# Altium PCB EverySyncBoard.PcbDoc.pcbdoc (part 1 of 2)
Units mil, origin at the board's own origin, x right, y up, seen from the top; angles counter-clockwise.
Board outline 3490 x 2630 mil, 2 copper layers (Top Layer, Bottom Layer); 156 components, 115 nets, 534 pads, 233 vias.
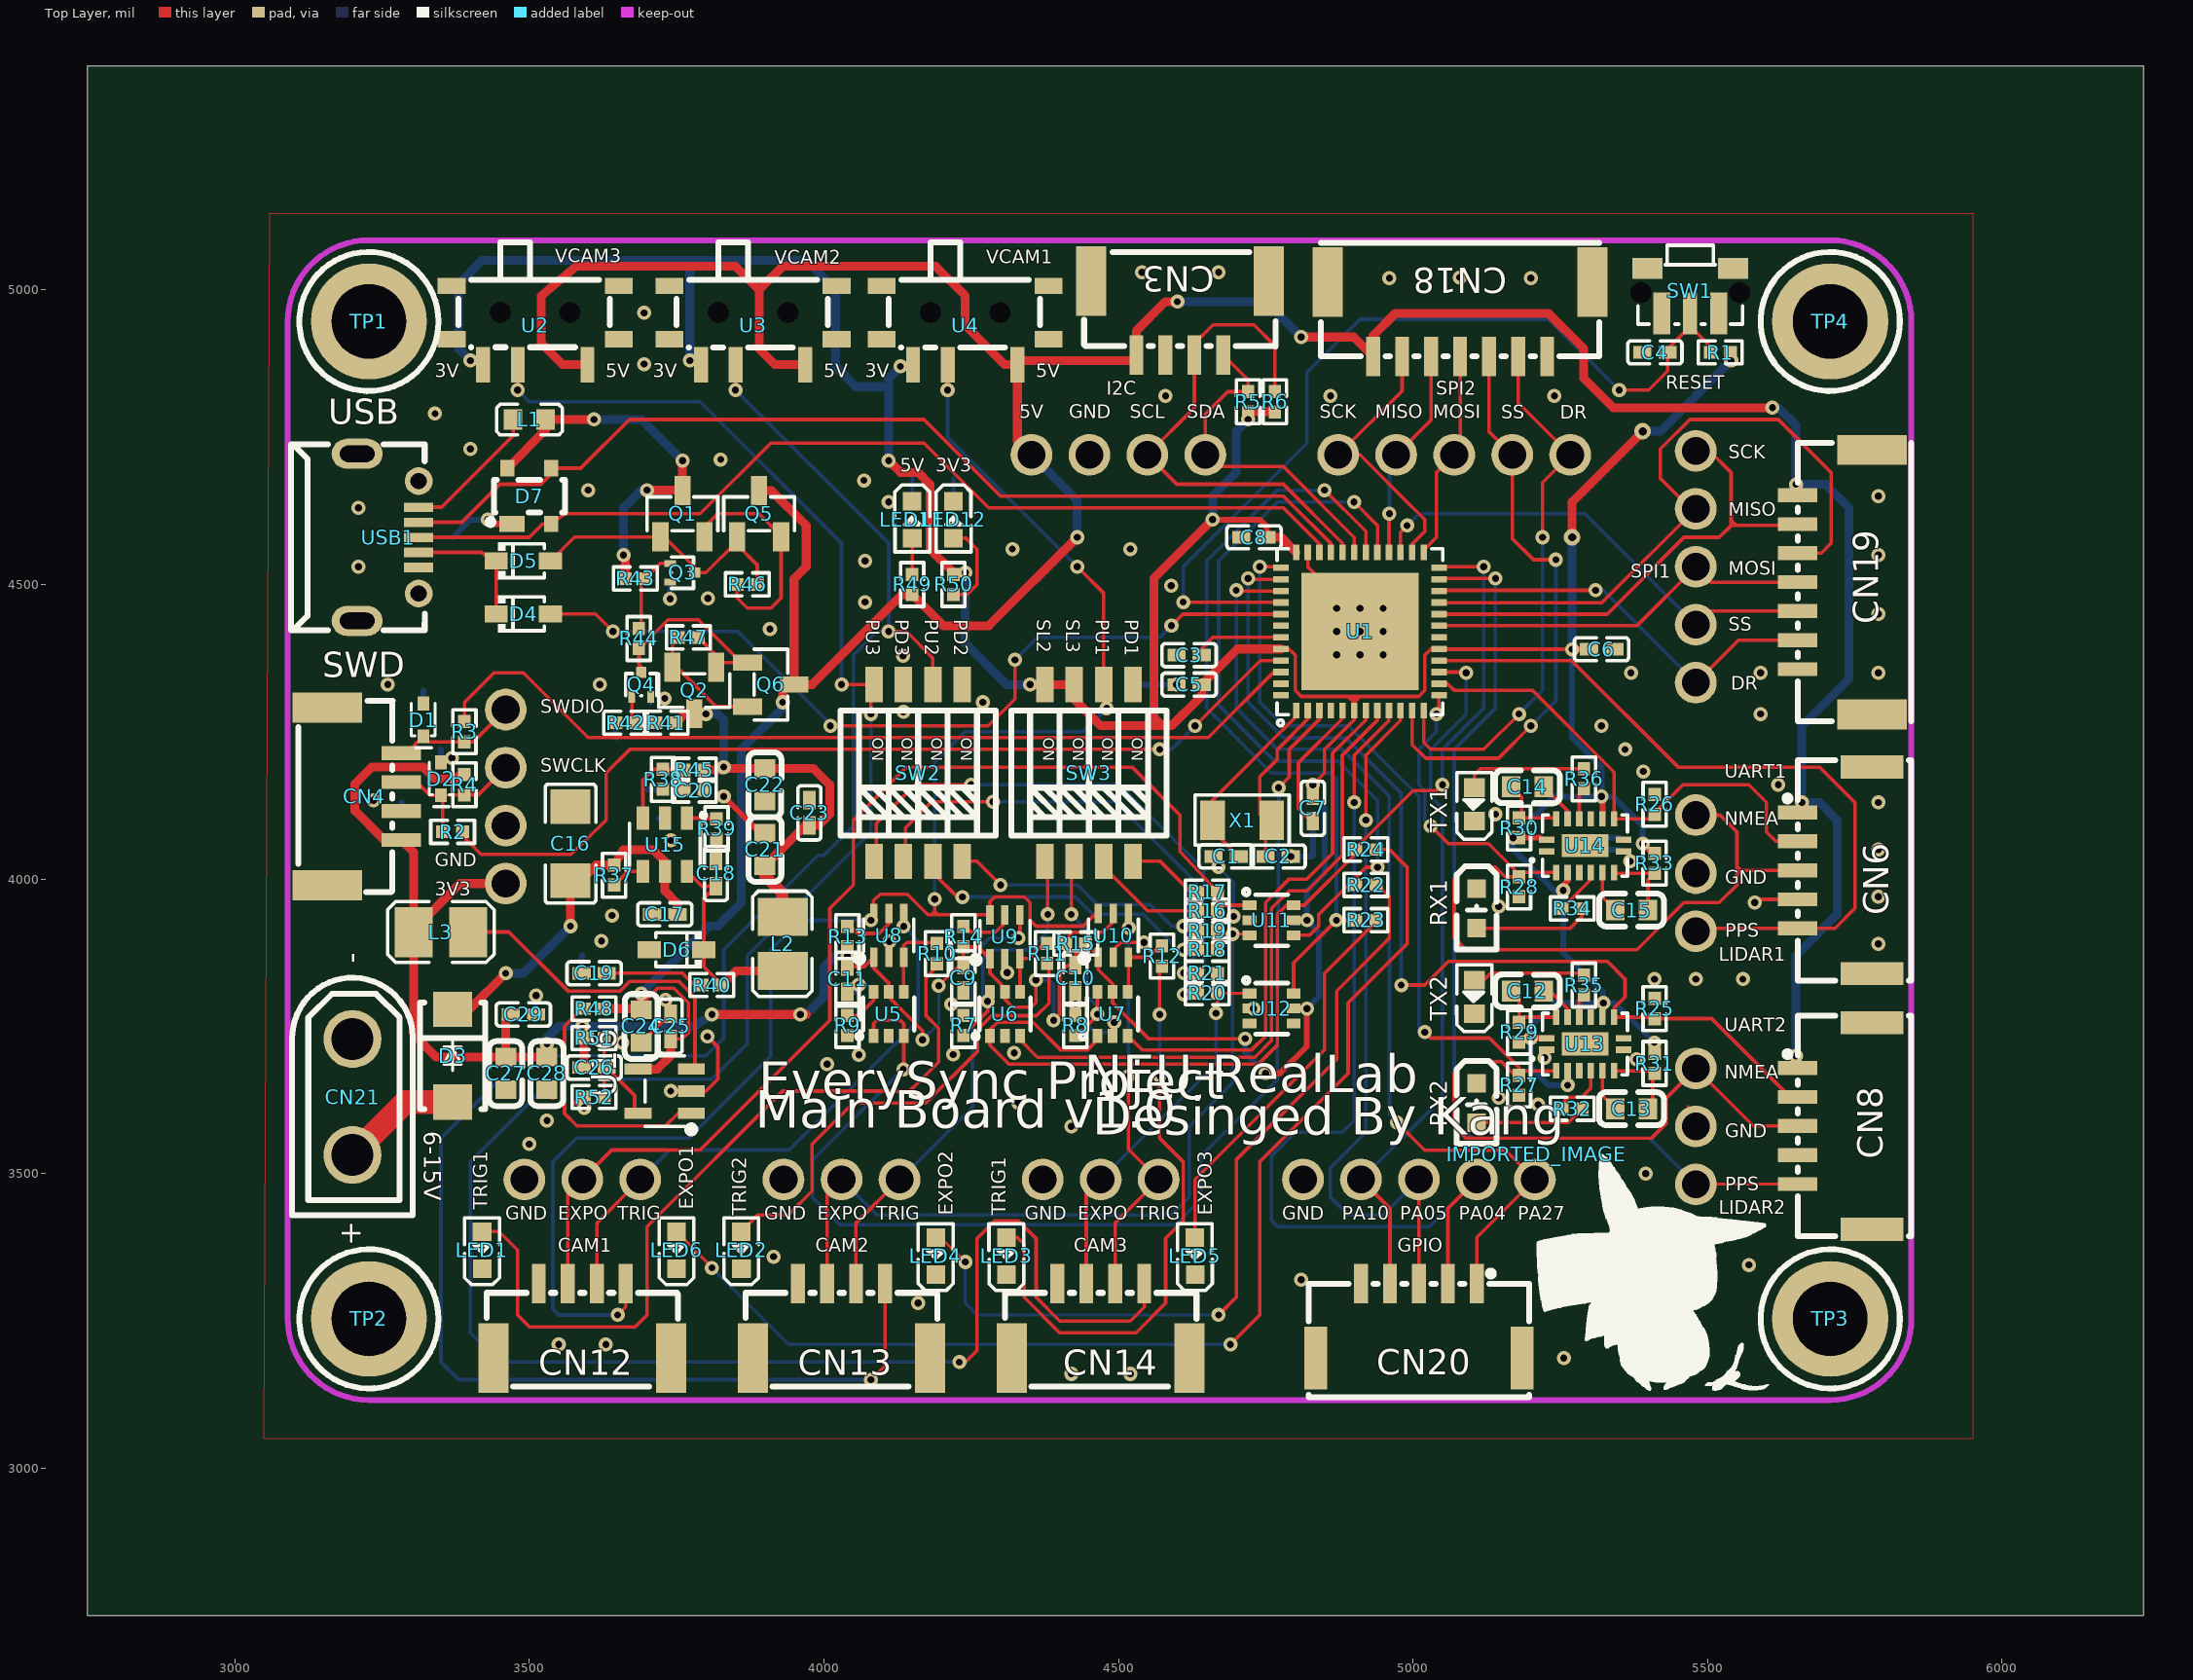
[diagram p0: Top Layer view]
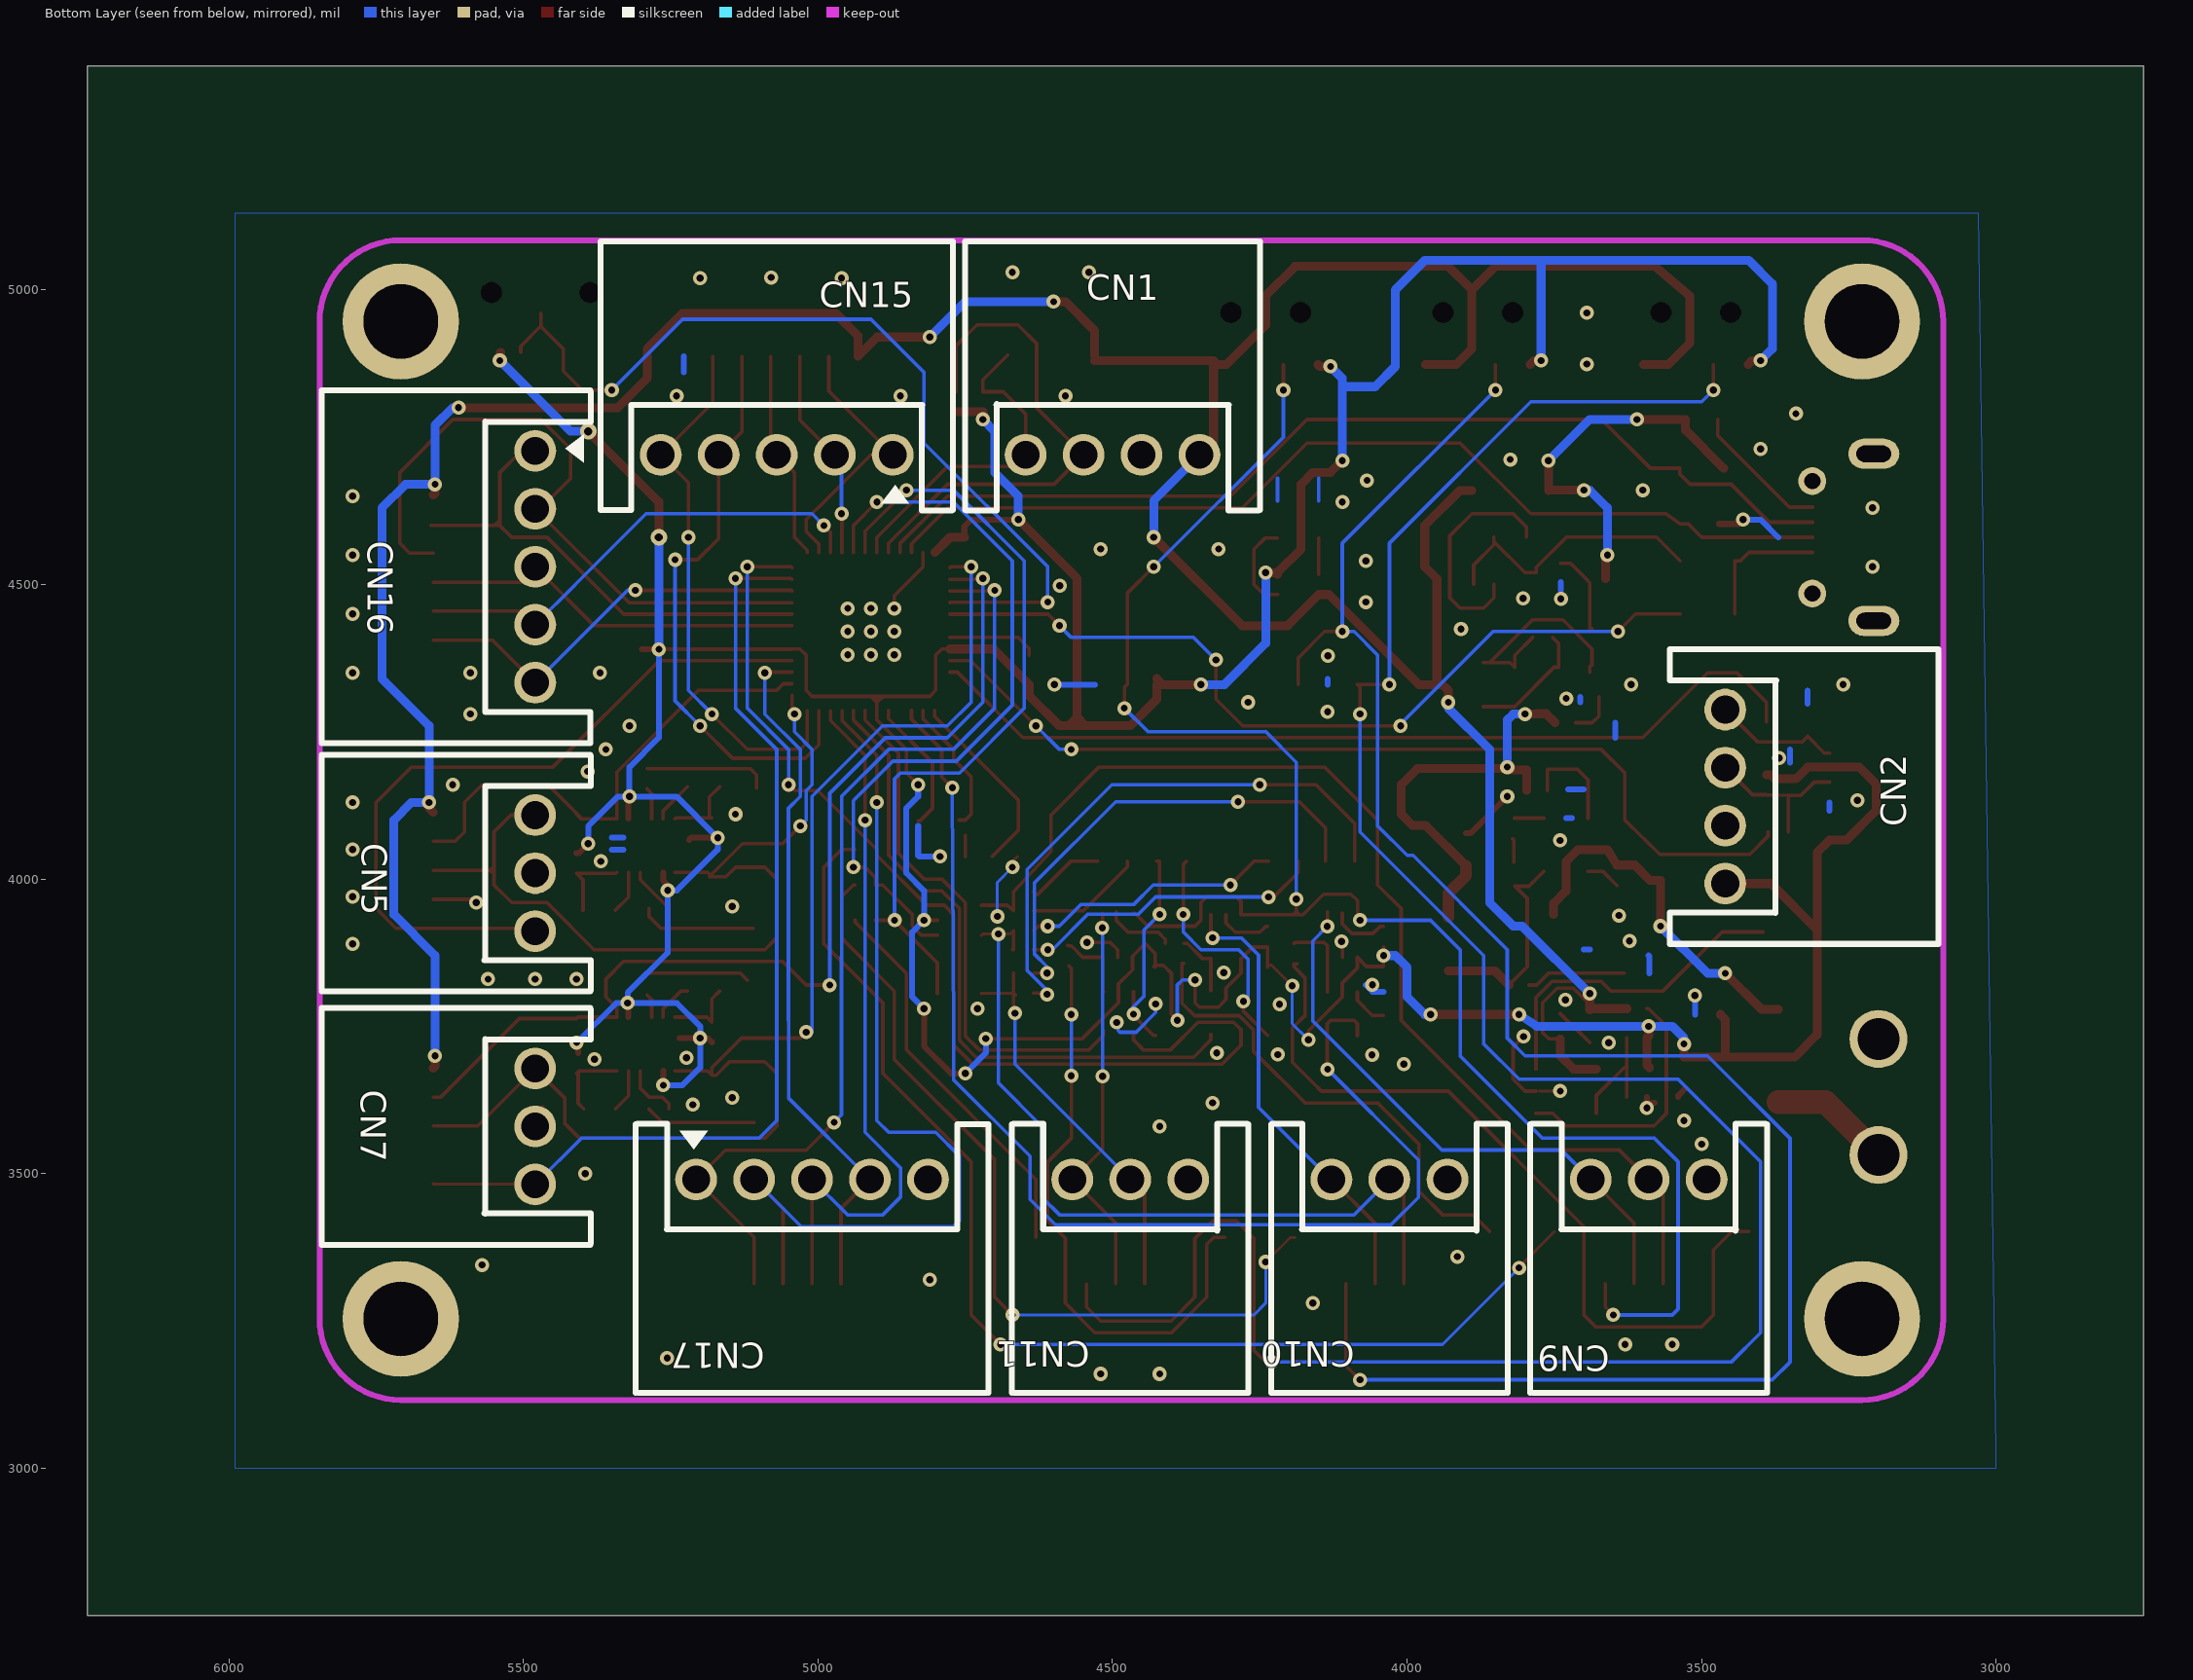
[diagram p1: Bottom Layer view, seen from below]

## Layer stack, top to bottom
Top Layer: signal copper (thickness not stored)
Dielectric: dielectric 12.6, FR-4, Dk 4.8
Bottom Layer: signal copper (thickness not stored)

## Board outline
6240,2750 2750,2750 2750,5380 6240,5380

## Components (designator, comment, footprint, x,y, rotation, side; value= is the part's Value field where it differs from the comment)
C1 "18pF/0402/50V" C0402 4682.87,4038.29 r180 top
C2 "18pF/0402/50V" C0402 4771.17,4038.19 r0 top
C3 "100nF/0603/50V" C0402 4620,4380 r180 top
C4 "100nF/0402/50V" C0402 5410.58,4893.88 r0 top
C5 "100nF/0603/50V" C0402 4620,4330 r180 top
C6 "100nF/0603/50V" C0402 5320,4390 r0 top
C7 "100nF/0603/50V" C0402 4830,4120 r270 top
C8 "100nF/0603/50V" C0402 4730,4580 r180 top
C9 "100nF/0603/50V" C0402 4236.85,3832.26 r270 top
C10 "100nF/0603/50V" C0402 4426.85,3832.26 r270 top
C11 "100nF/0603/50V" C0402 4040,3830 r270 top
C12 "2.2u" C0603 5194.12,3810 r180 top
C13 "2.2u" C0603 5371.12,3610 r0 top
C14 "2.2u" C0603 5194.12,4156.73 r180 top
C15 "2.2u" C0603 5371.12,3947.23 r0 top
C16 "10uF/1206/50V" C1206 3570,4060 r270 top
C17 "100nF/0603/50V" C0402 3730,3940 r0 top
C18 "100nF/0603/50V" C0402 3816.85,4009.26 r90 top
C19 "100nF/0603/50V" C0402 3610,3840 r0 top
C20 "100nF/0603/50V" R0402 3779.85,4150.26 r0 top
C21 "22uF/0603/10V" C0603 3900,4050 r270 top
C22 "22uF/0603/10V" C0603 3900,4160 r90 top
C23 "100nF/0603/50V" C0402 3975.45,4112.26 r270 top
C24 "22uF/0603/10V" C0603 3690,3750 r90 top
C25 "100nF/0603/50V" C0402 3740,3750 r270 top
C26 "22pF/0402/50V" C0402 3610,3680 r180 top
C27 "22uF/0603/10V" C0603 3460,3670 r90 top
C28 "22uF/0603/10V" C0603 3530,3670 r90 top
C29 "100nF/0603/50V" C0402 3490,3770 r180 top
CN1 "A2501WR-4P" CONN-TH_A2501WR-4P 4499.97,4719.95 r0 bottom
CN2 "A2501WR-4P" CONN-TH_A2501WR-4P 3459.97,4139.95 r90 bottom
CN3 "A1257WR-S-4P" CONN-SMD_A1257WR-S-4P 4604.27,4952.2 r180 top
CN4 "A1257WR-S-4P" CONN-SMD_A1257WR-S-4P 3220,4140 r270 top
CN5 "A2501WR-3P" CONN-TH_A2501WR-3P 5479.98,4010 r270 bottom
CN6 "A1257WR-S-5P" CONN-SMD_A1257WR-S-5P 5715.97,4014.72 r90 top
CN7 "A2501WR-3P" CONN-TH_A2501WR-3P 5479.98,3580 r270 bottom
CN8 "A1257WR-S-5P" CONN-SMD_A1257WR-S-5P 5715.97,3580.72 r90 top
CN9 "A2501WR-3P" CONN-TH_A2501WR-3P 3589.98,3490 r180 bottom
CN10 "A2501WR-3P" CONN-TH_A2501WR-3P 4029.98,3490 r180 bottom
CN11 "A2501WR-3P" CONN-TH_A2501WR-3P 4470,3490 r180 bottom
CN12 "A1257WR-S-4P" CONN-SMD_A1257WR-S-4P 3590,3250 r0 top
CN13 "A1257WR-S-4P" CONN-SMD_A1257WR-S-4P 4030,3250 r0 top
CN14 "A1257WR-S-4P" CONN-SMD_A1257WR-S-4P 4470,3250 r0 top
CN15 "A2501WR-5P" CONN-TH_A2501WR-5P 5069.96,4720 r0 bottom
CN16 "A2501WR-5P" CONN-TH_A2501WR-5P 5479.96,4530 r270 bottom
CN17 "A2501WR-5P" CONN-TH_A2501WR-5P 5010,3490 r180 bottom
CN18 "A1257WR-S-7P" CONN-SMD_A1257WR-S-7P 5079.97,4950 r180 top
CN19 "A1257WR-S-7P" CONN-SMD_A1257WR-S-7P 5715.97,4503.9 r90 top
CN20 "A1257WR-S-5P" CONN-SMD_A1257WR-S-5P 5010,3250 r0 top
CN21 "XT30UPB-M" CONN-TH_XT30UPB-M 3199.97,3629.99 r270 top
D1 "ESD5Z3.3T1G-MS" SOD-523 3320,4270 r90 top
D2 "ESD5Z3.3T1G-MS" SOD-523 3350,4170 r90 top
D3 "SS54B" DO-214BA_L4.8-W2.9-LS5.3-RD 3370,3700 r270 top
D4 "SD103AWS" SOD-323_L1.8-W1.3-LS2.5-RD 3490,4450 r0 top
D5 "SD103AWS" SOD-323_L1.8-W1.3-LS2.5-RD 3490,4540 r0 top
D6 "SD103AWS" SOD-323_L1.8-W1.3-LS2.5-RD 3750,3880 r180 top
D7 "PRTR5V0U2X" SOT-143_L2.9-W1.3-P1.92-LS2.3-BL 3500,4650 r0 top
IMPORTED_IMAGE "IMPORTED_IMAGE" IMPORTED_IMAGE 5209.91,3533.32 r0 top
L1 "BLM18SG121TN1D" L0603 3500,4780 r180 top
L2 "10uH" L1008 3930,3890 r90 top
L3 "PSPNAQ252012-2R2M" L2520 3350,3910 r180 top
LED1 "19-217/GHC-YR1S2/3T" LED0603-RD 3420,3370 r90 top
LED2 "19-217/GHC-YR1S2/3T" LED0603-RD 3860,3370 r90 top
LED3 "19-217/GHC-YR1S2/3T" LED0603-RD 4310,3360 r90 top
LED4 "19-213/Y2C-CQ2R2L/3T(CY)" LED0603-RD-YELLOW 4190,3360 r90 top
LED5 "19-213/Y2C-CQ2R2L/3T(CY)" LED0603-RD-YELLOW 4630,3360 r90 top
LED6 "19-213/Y2C-CQ2R2L/3T(CY)" LED0603-RD-YELLOW 3750,3370 r90 top
LED11 "KT-0603R" LED0603-RD 4150,4610 r270 top
LED12 "19-213/Y2C-CQ2R2L/3T(CY)" LED0603-RD-YELLOW 4220,4610 r270 top
Q1 "AO3401" SOT-23-3_L2.9-W1.3-P1.90-LS2.4-BR 3760,4620 r270 top
Q2 "AO3401" SOT-23-3_L2.9-W1.3-P1.90-LS2.4-BR 3780,4320 r90 top
Q3 "2SK3541" SOT-723_L1.2-W0.8-P0.40-LS1.2-BR 3760,4520 r180 top
Q4 "2SK3541" SOT-723_L1.2-W0.8-P0.40-LS1.2-BR 3690,4330 r270 top
Q5 "AO3401" SOT-23-3_L2.9-W1.3-P1.90-LS2.4-BR 3890,4620 r270 top
Q6 "AO3401" SOT-23-3_L2.9-W1.3-P1.90-LS2.4-BR 3910,4330 r180 top
R1 "10K/0402/1%" R0402 5521.58,4893.88 r0 top
R2 "22R/0402/1%" R0402 3370,4080 r180 top
R3 "22R/0402/1%" R0402 3390,4250 r270 top
R4 "10K/0402/1%" R0402 3390,4160 r90 top
R5 "2.2K/0402/1%" R0402 4720,4810 r270 top
R6 "2.2K/0402/1%" R0402 4765.5,4810 r270 top
R7 "10K/0402/1%" R0402 4236.85,3751.5 r90 top
R8 "10K/0402/1%" R0402 4426.85,3751.5 r90 top
R9 "10K/0402/1%" R0402 4040,3751.5 r270 top
R10 "2K2/0402/1%" R0402 4191.85,3873.26 r90 top
R11 "2K2/0402/1%" R0402 4379,3873.5 r90 top
R12 "2K2/0402/1%" R0402 4573.85,3869.26 r90 top
R13 "10K/0402/1%" R0402 4040,3902.26 r90 top
R14 "10K/0402/1%" R0402 4236.85,3902.26 r90 top
R15 "10K/0402/1%" R0402 4427.5,3890.5 r180 top
R16 "10K/0402/1%" R0402 4650.85,3946.26 r180 top
R17 "10K/0402/1%" R0402 4650.85,3978.26 r0 top
R18 "10K/0402/1%" R0402 4650.85,3880.26 r180 top
R19 "10K/0402/1%" R0402 4650.85,3912.26 r0 top
R20 "10K/0402/1%" R0402 4650.85,3806.26 r180 top
R21 "10K/0402/1%" R0402 4650.85,3840.26 r0 top
R22 "2K2/0402/1%" R0402 4920,3990 r180 top
R23 "2K2/0402/1%" R0402 4920,3930 r180 top
R24 "2K2/0402/1%" R0402 4920,4050 r180 top
R25 "10K/0402/1%" R0402 5410,3780 r270 top
R26 "10K/0402/1%" R0402 5410,4126.73 r270 top
R27 "10K/0402/1%" R0402 5180,3650 r90 top
R28 "10K/0402/1%" R0402 5180,3986.73 r90 top
R29 "10K/0402/1%" R0402 5180,3740 r270 top
R30 "10K/0402/1%" R0402 5180,4086.73 r270 top
R31 "10K/0402/1%" R0402 5410,3687 r90 top
R32 "2K2/0402/1%" R0402 5270,3610 r180 top
R33 "10K/0402/1%" R0402 5410,4026.73 r90 top
R34 "2K2/0402/1%" R0402 5270,3950 r180 top
R35 "2K2/0402/1%" R0402 5290,3820 r270 top
R36 "2K2/0402/1%" R0402 5290,4170 r270 top
R37 "100k/0402/1%" R0402 3643.85,4006.56 r90 top
R38 "7.68K/0402/1%" R0402 3726.85,4169.26 r270 top
R39 "10R/0402/1%" R0402 3817.85,4085.26 r270 top
R40 "10R/0402/1%-NC" R0402 3810,3820 r0 top
R41 "100k/0402/1%" R0402 3731.85,4265.26 r0 top
R42 "100k/0402/1%" R0402 3663.85,4265.26 r0 top
R43 "100k/0402/1%" R0402 3680,4510 r180 top
R44 "470R/0402/1%" R0402 3685.85,4408.26 r90 top
R45 "40.2K/0402/1%" R0402 3779.85,4185.26 r0 top
R46 "10k/0402/1%" R0402 3870,4500 r180 top
R47 "10k/0402/1%" R0402 3770,4410 r180 top
R48 "100k/0402/1%" R0402 3610,3780 r0 top
R49 "10K/0402/1%" R0402 4150,4500 r270 top
R50 "10K/0402/1%" R0402 4220,4500 r90 top
R51 "100k/0402/1%" R0402 3610,3730 r180 top
R52 "22.1K/0402/1%" R0402 3610,3630 r0 top
RX1 "0603White light_C2290" LED0603-R-RD_WHITE 5108.17,3949.99 r270 top
RX2 "0603White light_C2290" LED0603-R-RD_WHITE 5108.17,3619.99 r270 top
SW1 "SKRTLAE010" KEY-SMD_SKRTLAE010 5470.58,4998.38 r180 top
SW2 "DSHP04TSGER" SW-SMD_8P-L6.7-W5.4-P1.27-LS8.4 4160.01,4179.99 r0 top
SW3 "DSHP04TSGER" SW-SMD_8P-L6.7-W5.4-P1.27-LS8.4 4450.01,4179.99 r0 top
TP1 "铜柱连接孔" 3MM铜柱孔 3227.8,4946.45 r0 top
TP2 "铜柱连接孔" 3MM铜柱孔 3227.8,3253.55 r0 top
TP3 "铜柱连接孔" 3MM铜柱孔 5708.1,3253.55 r0 top
TP4 "铜柱连接孔" 3MM铜柱孔 5708.1,4946.45 r0 top
TX1 "19-217/BHC-ZL1M2RY/3T" LED0603-FD_BLUE 5104.11,4126.69 r90 top
TX2 "19-217/BHC-ZL1M2RY/3T" LED0603-FD_BLUE 5104.11,3799.99 r90 top
U1 "ATSAMD21G18A-MU" QFN-48_L7.0-W7.0-P0.50-TL-EP5.1 4910,4420 r90 top
U2 "HX MSK12C02-HB" SW-SMD_MSK12C02-HB 3510,4940 r180 top
U3 "HX MSK12C02-HB" SW-SMD_MSK12C02-HB 3879.97,4939.96 r180 top
U4 "HX MSK12C02-HB" SW-SMD_MSK12C02-HB 4239.97,4939.96 r180 top
U5 "NC7SZ157P6X" SC-70-6_L2.0-W1.3-P0.65-LS2.1-BR 4109.98,3770.99 r270 top
U6 "NC7SZ157P6X" SC-70-6_L2.0-W1.3-P0.65-LS2.1-BR 4307.48,3770.99 r270 top
U7 "NC7SZ157P6X" SC-70-6_L2.0-W1.3-P0.65-LS2.1-BR 4489.98,3770.99 r270 top
U8 "SN74LVC1T45DCKR" SC-70-6_L2.2-W1.3-P0.65-LS2.2-BR 4110.07,3904.29 r270 top
U9 "SN74LVC1T45DCKR" SC-70-6_L2.2-W1.3-P0.65-LS2.2-BR 4307.47,3901.99 r270 top
U10 "SN74LVC1T45DCKR" SC-70-6_L2.2-W1.3-P0.65-LS2.2-BR 4491.37,3904.29 r270 top
U11 "NC7WZ16P6X" SC-70-6_L2.2-W1.3-P0.65-LS2.1-BR 4759.98,3929.99 r180 top
U12 "NC7WZ16P6X" SC-70-6_L2.2-W1.3-P0.65-LS2.1-BR 4759.98,3779.99 r180 top
U13 "74AHC123ABQ,115" 74AHC123ABQ,115 5292.07,3719.99 r0 top
U14 "74AHC123ABQ,115" 74AHC123ABQ,115 5292.07,4056.69 r0 top
U15 "LGS5145" SOT-23-6_L2.9-W1.7-P0.95-LS2.8-BL 3730.37,4058.29 r180 top
U16 "SY8088IAAC" SOT-23-5_L3.0-W1.7-P0.95-LS2.8-BL 3729.97,3639.99 r90 top
USB1 "micro USBFemale" MICRO-USB-SMD_5P-P0.65-H-F_C10418 3260.04,4580 r270 top
X1 "-" OSC-SMD_L3.2-W1.5 4710,4100 r180 top

## Footprints (in the part's own frame and the unit in brackets; to place one, negate y for a bottom-side part, rotate by r counter-clockwise, add the part's x,y. Pads: shape width x height; smd on the part's side, far side on the other; paste and mask are expansions set on the pad)
3MM铜柱孔 [mm]
  round 5 hole 3.2 slot 3.205 at 0 deg paste+0 mask+0.051: 1(0,0)
  silkscreen extent -3,-3 3,3
74AHC123ABQ,115 [mm]
  rect 0.665x0.28 smd paste-100 mask+0.051: 1(-1.658,-0.25) 8(1.658,-0.25) 9(1.658,0.25) 16(-1.658,0.25)
  rect 0.28x0.665 smd paste-100 mask+0.051: 2(-1.25,-1.157) 3(-0.75,-1.157) 4(-0.25,-1.157) 5(0.25,-1.157) 6(0.75,-1.157) 7(1.25,-1.157) 10(1.25,1.157) 11(0.75,1.157) 12(0.25,1.157) 13(-0.25,1.157) 14(-0.75,1.157) 15(-1.25,1.157)
  rect 2x1 smd paste-100 mask+0.051: 17(0,0)
  silkscreen extent -2.36,-1.33 1.83,1.33
C0402 [mm]
  rect 0.79x0.54 smd paste-100 mask+0.051: 1(-0.545,0) 2(0.545,0)
  silkscreen extent -1.17,-0.5 1.17,0.5
C0603 [mm]
  rect 0.8x0.9 smd paste+0 mask+0.051: 1(-0.7,0) 2(0.7,0)
  silkscreen extent -1.41,-0.71 1.39,0.72
C1206 [mm]
  rect 1.485x1.728 smd paste-100 mask+0.051: 1(-1.592,0) 2(1.593,0)
  silkscreen extent -2.56,-1.09 2.56,1.09
CONN-SMD_A1257WR-S-4P [mm]
  rect 0.6x1.7 smd paste+0 mask+0.051: 1(1.874,1.6) 2(0.625,1.6) 3(-0.625,1.6) 4(-1.875,1.6)
  rect 1.3x3 smd paste+0 mask+0.051: 5(3.825,-1.6) 6(-3.825,-1.6)
  silkscreen extent -4.13,-2.84 4.13,1.23
CONN-SMD_A1257WR-S-5P [mm]
  rect 0.6x1.7 smd paste+0 mask+0.051: 1(2.499,1.6) 2(1.25,1.6) 3(0,1.6) 4(-1.25,1.6) 5(-2.499,1.6)
  rect 1x2.7 smd paste+0 mask+0.051: 6(4.45,-1.6) 7(-4.45,-1.6)
  silkscreen extent -4.75,-3.3 4.75,2.17
CONN-SMD_A1257WR-S-7P [mm]
  rect 0.6x1.7 smd paste+0 mask+0.051: 1(3.75,1.6) 2(2.5,1.6) 3(1.25,1.6) 4(0,1.6) 5(-1.25,1.6) 6(-2.5,1.6) 7(-3.75,1.6)
  rect 1.3x3 smd paste+0 mask+0.051: 8(5.7,-1.6) 9(-5.7,-1.6)
  silkscreen extent -6,-3.3 6,1.6
CONN-TH_A2501WR-3P [mm]
  round 1.8 hole 1.2 copper offset 0,0 paste+0 mask+0.051: 1(-2.5,0) 2(0,0) 3(2.5,0)
  silkscreen extent -5.1,-9.2 5.1,2.4
CONN-TH_A2501WR-4P [mm]
  round 1.8 hole 1.2 paste+0 mask+0.051: 1(-3.75,0) 2(-1.25,0) 3(1.25,0) 4(3.75,0)
  silkscreen extent -6.35,-9.2 6.35,2.4
CONN-TH_A2501WR-5P [mm]
  round 1.8 hole 1.2 paste+0 mask+0.051: 1(-5,0) 2(-2.5,0) 3(0,0) 4(2.5,0) 5(5,0)
  silkscreen extent -7.6,-9.2 7.6,2.4
CONN-TH_XT30UPB-M [mm]
  round 2.5 hole 1.8 copper offset 0,0 paste+0 mask+0.051: 1(-2.5,0) 2(2.5,0)
  silkscreen extent -5.14,-2.6 5.1,2.6
DO-214BA_L4.8-W2.9-LS5.3-RD [mm]
  rect 1.52x1.68 smd paste+0 mask+0.051: 1(-2,0) 2(2,0)
  silkscreen extent -2.3,-1.4 2.3,1.4
IMPORTED_IMAGE [mil]
  silkscreen extent 0,-402 394,0
KEY-SMD_SKRTLAE010 [mm]
  rect 0.75x1.8 smd paste+0 mask+0.051: 1(-1.225,0.975) 3(1.225,0.975)
  rect 0.6x1.8 smd paste+0 mask+0.051: 2(0.015,0.975)
  rect 1.3x0.9 smd paste+0 mask+0.051: 4(-1.85,-0.975) 5(1.85,-0.975)
  Multi-Layer board cut-out: 1.675,0.075 1.72,-0.12 1.844,-0.277 2.025,-0.364 2.225,-0.364 2.406,-0.277 2.53,-0.12 2.575,0.075 2.575,0.075 2.53,0.27 2.406,0.427 2.225,0.514 2.025,0.514 1.844,0.427 1.72,0.27 1.675,0.075
  Multi-Layer board cut-out: -2.575,0.075 -2.53,-0.12 -2.405,-0.277 -2.225,-0.364 -2.025,-0.364 -1.844,-0.277 -1.719,-0.12 -1.675,0.075 -1.675,0.075 -1.719,0.27 -1.844,0.427 -2.025,0.514 -2.225,0.514 -2.405,0.427 -2.53,0.27 -2.575,0.075
  silkscreen extent -2.25,-1.96 2.25,1.43
L0603 [mm]
  rect 0.8x0.864 smd paste-100 mask+0.051: 1(-0.7,0) 2(0.7,0)
  silkscreen extent -1.42,-0.65 1.41,0.67
L1008 [mm]
  rect 1.635x2.16 smd paste-100 mask+0.051: 1(-1.168,0) 2(1.167,0)
  silkscreen extent -2.27,-1.27 2.27,1.3
L2520 [mm]
  rect 1.635x2.16 smd paste-100 mask+0.051: 1(-1.168,0) 2(1.167,0)
  silkscreen extent -2.3,-1.31 2.3,1.31
LED0603-FD_BLUE [mm]
  rect 0.8x0.9 smd paste+0 mask+0.051: 1(-0.72,0) 2(0.72,0)
  silkscreen extent -1.5,-0.76 1.38,0.76
LED0603-R-RD_WHITE [mm]
  rect 0.8x0.8 smd paste+0 mask+0.051: 1(0.851,0) 2(-0.851,0)
  silkscreen extent -1.82,-0.86 1.77,0.86
LED0603-RD [mm]
  rect 0.8x0.8 smd paste+0 mask+0.051: 1(-0.799,-0.003) 2(0.799,0.003)
  silkscreen extent -1.49,-0.75 1.39,0.76
LED0603-RD-YELLOW [mm]
  rect 0.8x0.8 smd paste+0 mask+0.051: 1(-0.799,-0.003) 2(0.799,0.003)
  silkscreen extent -1.49,-0.75 1.39,0.76
MICRO-USB-SMD_5P-P0.65-H-F_C10418 [mm]
  rect 0.4x1.25 smd paste-100 mask+0.051: 1(-1.3,1.325) 2(-0.65,1.325) 3(0,1.325) 4(0.65,1.325) 5(1.3,1.325)
  round 1.2 hole 0.7 paste+0 mask+0.051: SH0(-2.425,1.325) SH3(2.425,1.325)
  oval 1.3x2.2 hole 0.7 slot 1.5 at 90 deg paste+0 mask+0.051: SH1(-3.6,-1.325) SH2(3.6,-1.325)
  silkscreen extent -4,-4.17 4,1.59
OSC-SMD_L3.2-W1.5 [mm]
  rect 1.05x1.7 smd paste+0 mask+0.051: 1(-1.275,0) 2(1.275,0)
  silkscreen extent -2.03,-1.08 2.03,1.08
QFN-48_L7.0-W7.0-P0.50-TL-EP5.1 [mm]
  rect 0.665x0.28 smd paste-100 mask+0.051: 1(-3.407,2.75) 2(-3.407,2.25) 3(-3.407,1.75) 4(-3.407,1.25) 5(-3.407,0.75) 6(-3.407,0.25) 7(-3.407,-0.25) 8(-3.407,-0.75) 9(-3.407,-1.25) 10(-3.407,-1.75) 11(-3.407,-2.25) 12(-3.407,-2.75) 25(3.407,-2.75) 26(3.407,-2.25) 27(3.407,-1.75) 28(3.407,-1.25) 29(3.407,-0.75) 30(3.407,-0.25) 31(3.407,0.25) 32(3.407,0.75) 33(3.407,1.25) 34(3.407,1.75) 35(3.407,2.25) 36(3.407,2.75)
  rect 0.28x0.665 smd paste-100 mask+0.051: 13(-2.75,-3.407) 14(-2.25,-3.407) 15(-1.75,-3.407) 16(-1.25,-3.407) 17(-0.75,-3.407) 18(-0.25,-3.407) 19(0.25,-3.407) 20(0.75,-3.407) 21(1.25,-3.407) 22(1.75,-3.407) 23(2.25,-3.407) 24(2.75,-3.407) 37(2.75,3.407) 38(2.25,3.407) 39(1.75,3.407) 40(1.25,3.407) 41(0.75,3.407) 42(0.25,3.407) 43(-0.25,3.407) 44(-0.75,3.407) 45(-1.25,3.407) 46(-1.75,3.407) 47(-2.25,3.407) 48(-2.75,3.407)
  rect 5.06x5.06 smd paste-100 mask+0.051: 49(0,0)
  silkscreen extent -4.06,-3.58 3.58,3.58
R0402 [mm]
  rect 0.566x0.54 smd paste-100 mask+0.051: 1(-0.433,0) 2(0.433,0)
  silkscreen extent -0.94,-0.5 0.94,0.5
SC-70-6_L2.0-W1.3-P0.65-LS2.1-BR [mm]
  rect 0.6x0.42 smd paste+0 mask+0.051: 1(0.95,-0.65) 2(0.95,0) 3(0.95,0.65) 4(-0.95,0.65) 5(-0.95,0) 6(-0.95,-0.65)
  silkscreen extent -0.7,-1.39 1.09,1.1
SC-70-6_L2.2-W1.3-P0.65-LS2.1-BR [mm]
  rect 0.6x0.42 smd paste+0 mask+0.051: 1(0.95,-0.65) 2(0.95,0) 3(0.95,0.65) 4(-0.95,0.65) 5(-0.95,0) 6(-0.95,-0.65)
  silkscreen extent -0.7,-1.34 1.22,1.1
SC-70-6_L2.2-W1.3-P0.65-LS2.2-BR [mm]
  rect 0.841x0.315 smd paste+0 mask+0.051: 1(0.945,-0.65) 2(0.945,0) 3(0.945,0.65) 4(-0.945,0.65) 5(-0.945,0) 6(-0.945,-0.65)
  silkscreen extent -0.7,-1.41 1.15,1.08
SOD-323_L1.8-W1.3-LS2.5-RD [mm]
  rect 1x0.75 smd paste+0 mask+0.051: 1(-1.173,0) 2(1.173,0)
  silkscreen extent -1.08,-0.8 0.9,0.8
SOD-523 [mm]
  rect 0.6x0.5 smd paste+0 mask+0.051: 1(-0.71,0) 2(0.71,0)
  silkscreen extent -1.2,-0.51 0.72,0.51
SOT-23-3_L2.9-W1.3-P1.90-LS2.4-BR [mm]
  rect 1.25x0.7 smd paste+0 mask+0.051: 1(1,-0.95) 2(1,0.95) 3(-1,0)
  silkscreen extent -0.73,-1.53 0.73,1.53
SOT-23-5_L3.0-W1.7-P0.95-LS2.8-BL [mm]
  rect 0.49x1.157 smd paste+0 mask+0.051: 1(-0.95,-1.154) 2(0,-1.154) 3(0.95,-1.154)
  rect 0.49x1.175 smd paste+0 mask+0.051: 4(0.95,1.154) 5(-0.95,1.154)
  silkscreen extent -1.8,-1.29 1.53,0.85
SOT-23-6_L2.9-W1.7-P0.95-LS2.8-BL [mm]
  rect 0.532x0.99 smd paste+0 mask+0.051: 1(-0.95,-1.145) 2(0,-1.145) 3(0.95,-1.145) 4(0.95,1.145) 5(0,1.145) 6(-0.95,1.145)
  silkscreen extent -1.75,-1.37 1.53,0.93
SOT-143_L2.9-W1.3-P1.92-LS2.3-BL [mm]
  rect 1.1x0.7 smd paste+0 mask+0.05: 1(-0.75,-1.2)
  rect 0.6x0.7 smd paste+0 mask+0.05: 2(0.95,-1.2) 3(0.95,1.2) 4(-0.95,1.2)
  silkscreen extent -1.8,-1.24 1.55,0.7
SOT-723_L1.2-W0.8-P0.40-LS1.2-BR [mil]
  rect 19.25x11.57 smd paste+0 mask+2: 1(20.84,-15.74) 2(20.84,15.75)
  rect 19.25x17.09 smd paste+0 mask+2: 3(-20.85,0)
  silkscreen extent -19,-27 19,27
SW-SMD_8P-L6.7-W5.4-P1.27-LS8.4 [mil]
  rect 30x60 smd paste+0 mask+2: 1(-75,-150) 2(-25,-150) 3(25,-150) 4(75,-150) 5(75,150) 6(25,150) 7(-25,150) 8(-75,150)
  silkscreen extent -132,-106 132,106
SW-SMD_MSK12C02-HB [mm]
  rect 0.6x1.524 smd paste+0 mask+0.051: 1(-2.25,1.7) 2(0.75,1.7) 3(2.25,1.7)
  rect 1.2x0.7 smd paste+0 mask+0.051: 4(-3.6,0.6) 5(-3.6,-1.7) 6(3.6,-1.7) 7(3.6,0.6)
  Multi-Layer board cut-out: 1.05,-0.55 1.095,-0.745 1.22,-0.902 1.4,-0.989 1.6,-0.989 1.781,-0.902 1.906,-0.745 1.95,-0.55 1.95,-0.55 1.906,-0.355 1.781,-0.198 1.6,-0.111 1.4,-0.111 1.22,-0.198 1.095,-0.355 1.05,-0.55
  Multi-Layer board cut-out: -1.95,-0.55 -1.905,-0.745 -1.78,-0.902 -1.6,-0.989 -1.4,-0.989 -1.219,-0.902 -1.094,-0.745 -1.05,-0.55 -1.05,-0.55 -1.094,-0.355 -1.219,-0.198 -1.4,-0.111 -1.6,-0.111 -1.78,-0.198 -1.905,-0.355 -1.95,-0.55
  silkscreen extent -3.22,-3.57 3.3,0.95

## Via types
v1: diameter 24, hole 12, Top Layer to Bottom Layer, 231 vias
v2: diameter 28, hole 14, Top Layer to Bottom Layer, 2 vias

## Nets (pads, with @x,y where several pads share a name; then routed paths per layer and width w, separated by ;. In a path a pad name is that pad's centre, name@x,y a point inside that pad or via, vN(x,y) a via of type N, cw(c..) or ccw(c..) an arc to the next point about the centre after c; other vN are vias at no path point)
C1_1: C1.1 U1.1 X1.2 | length 324.8
  Top Layer w6: C1.1@4704.33,4038.29 4659.8,4082.81 X1.2@4659.81,4100 4659.8,4133.88 4751.77,4225.85 4801.73,4275.86 U1.1@4801.73,4285.85
C2_1: C2.1 U1.2 X1.1 | length 269.7
  Top Layer w6: C2.1@4749.71,4038.19 X1.1@4749.7,4073.86 ; X1.1@4760.2,4100 4750,4100 4739.97,4110.03 4739.97,4173.46 4769.97,4203.46 4769.97,4220 4821.47,4271.42 U1.2@4821.47,4285.85
C12_1: C12.1 U13.14 | length 67.7
  Top Layer w6: C12.1@5221.68,3810 5232.47,3810 5262.57,3779.95 U13.14@5262.57,3765.57
C13_1: C13.1 U13.6 | length 73.5
  Top Layer w6: U13.6@5321.6,3674.42 5321.59,3631.97 C13.1@5343.57,3610
C18_1: C18.1 D6.1 L2.1 R40.2 U15.6 | length 361.7
  Top Layer w6: U15.6@3767.75,4013.18 3793.13,3987.8 C18.1@3816.85,3987.8 3796.16,3967.11 D6.1@3796.16,3880 3796.16,3850.88 R40.2@3827.04,3820
  Top Layer w15: R40.2@3827.04,3820 3851.07,3844.03 L2.1@3930,3844.03
C18_2: C18.2 R39.2 | length 40.4
  Top Layer w6: C18.2@3818.89,4028.98 3818.89,4066.55 R39.2@3820.89,4068.55
C19_2: C19.2 R40.1 | length 169.8
  Top Layer w6: C19.2@3631.46,3840 3760,3840 3780,3820 R40.1@3792.96,3820
D3_2: CN21.2 D3.2 | length 207.2
  Top Layer w40: CN21.2@3199.98,3531.55 3289.69,3621.26 D3.2@3370,3621.26
D5_1: D4.1 D5.1 USB1.4 | length 227.6
  Top Layer w6: USB1.4@3312.2,4554.4 3420,4554.41 3434.41,4540 D5.1@3443.84,4540 D4.1@3443.84,4450
EXPCAM1: CN9.2 CN12.3 R16.1 R17.2 U11.1 | length 1946.4
  Top Layer w6: CN12.3@3565.39,3312.99 3565.39,3465.42 CN9.2@3589.98,3489.99 3639.98,3540 3790,3540 4010,3760 4010,3950 4050,3990 4050,4100 4140,4190 4523,4190 4604.5,4108.5 4604.5,4046.65 R17.2@4667.89,3978.26 R16.1@4667.9,3946.26 4678.64,3955.58 U11.1@4722.58,3955.58
EXPCAM2: CN10.2 CN13.3 R18.1 R19.2 U11.3 | length 1383.7
  Top Layer w5: R19.2@4667.89,3912.26 4673.48,3906.68 v1(4693.84,3906.68) 4720.33,3906.68 U11.3@4722.58,3904.4
  Top Layer w6: CN13.3@4005.39,3312.99 4005.39,3465.42 CN10.2@4029.98,3489.99 ; R19.2@4667.89,3912.26 R18.1@4667.9,3880.26 R18.1@4669.88,3880.27
  Bottom Layer w6: CN10.2@4029.98,3489.99 4089.98,3430 4590,3430 4620,3460 4620,3579.99 4693.84,3653.83 v1(4693.84,3906.68)
EXPCAM3: CN11.2 CN14.3 R20.1 R21.2 U12.1 | length 680.6
  Top Layer w5.91: R20.1@4664.6,3803.27 R20.1@4669.19,3807.86
  Top Layer w6: CN14.3@4445.4,3312.99 4445.4,3465.4 CN11.2@4470,3489.99 ; v1(4665.6,3772.27) 4667.9,3774.57 R20.1@4667.9,3806.26 ; R21.2@4667.89,3840.26 R20.1@4667.9,3806.26 ; U12.1@4722.58,3805.58 R20.1@4667.9,3806.26
  Bottom Layer w6: CN11.2@4470,3489.99 4665.6,3685.6 v1(4665.6,3772.27)
GND: C1.2 C2.2 C3.2 C4.1 C5.2 C6.2 C7.2 C8.2 C9.2 C10.2 C11.2 C16.1 C17.1 C19.1 C21.1 C22.1 C23.1 C24.1 C25.1 C27.1 C28.1 C29.1 CN1.2 CN2.2 CN3.2 CN3.5 CN3.6 CN4.2 CN4.5 CN4.6 CN5.2 CN6.4 CN6.6 CN6.7 CN7.2 CN8.4 CN8.6 CN8.7 CN9.3 CN10.3 CN11.3 CN12.4 CN12.5 CN12.6 CN13.4 CN13.5 CN13.6 CN14.4 CN14.5 CN14.6 CN17.5 CN18.7 CN18.8 CN18.9 CN19.7 CN19.8 CN19.9 CN20.5 CN20.6 CN20.7 CN21.1 D1.2 D2.2 D6.2 D7.1 LED1.1 LED2.1 LED3.1 LED4.1 LED5.1 LED6.1 LED11.1 LED12.1 Q3.2 Q4.2 R7.2 R8.2 R9.2 R25.1 R26.1 R27.1 R28.1 R38.2 R42.1 R52.1 RX1.2 RX2.2 SW1.1 SW1.3 SW1.4 SW1.5 SW2.5 SW2.7 SW3.5 TP1.1 TP2.1 TP3.1 TP4.1 TX1.1 TX2.1 U1.5 U1.18 U1.35 U1.42 U1.49 U2.4 U2.5 U2.6 U2.7 U3.4 U3.5 U3.6 U3.7 U4.4 U4.5 U4.6 U4.7 U5.2 U6.2 U7.2 U8.2 U9.2 U10.2 U11.2 U12.2 U13.1 U13.8 U13.9 U13.17 U14.1 U14.8 U14.9 U14.17 U15.2 U16.2 USB1.5 | length 1829.7
  Top Layer w5: v1(3740,3640) U16.2@3775.39,3639.99 ; C1.2@4661.41,4038.29 4670,4029.69 v1(4670,4020)
  Top Layer w6: C24.1@3690,3722.45 C25.1@3740,3771.46 ; U16.2@3781.19,3640 3800,3640 3820,3660 3820,3715 v1(3802.5,3732.5) ; U8.2@4109.88,3867.05 v1@4109.88,3889.26 ; U10.2@4491.36,3867.04 4491.36,3879.85 4504,3892.5 v1(4543.5,3892.5) ; U1.35@4821.42,4554.15 4821.42,4530 4870.63,4480.79 U1.49@4870.63,4459.37 ; C7.2@4830,4098.54 4826.96,4098.54 4805.5,4120 4805.5,4197.5 4880.47,4272.47 U1.5@4880.47,4285.85 ; CN7.2@5465,3563.54 5467.34,3565.88 CN7.2@5467.34,3612.93 ; v1(5580,3960) 5585.51,3965.51 CN6.4@5652.98,3965.51
  Top Layer w10: v1(3430,4610) 3437.25,4602.75 D7.1@3470.47,4602.75 ; C28.1@3530,3642.45 3540,3632.44 C28.1@3540,3630 ; 3580,3620 3584.5,3620 v1(3593,3611.5) ; v1(3593,3611.5) R52.1@3592.96,3630 ; v1(3830,4140) 3892.44,4077.56 C21.1@3900,4077.55
  Bottom Layer w5: v1(4670,4020) 4695.5,3994.5 v1(4695.5,3936.5)
  Bottom Layer w6: 4149.87,4641.47 4149.87,4680 ; 4219.87,4641.47 4219.87,4680 ; v1@4426.86,3779.3 4426.86,3773.14 4460,3740 4487.4,3740 4490,3742.59
  Bottom Layer w10: 3282.99,4115.4 3282.99,4130 ; 3320.01,4297.95 3320,4320 ; 3349.99,4197.95 3349.99,4220 ; 3370,4580 3400,4610 v1(3430,4610) ; 3511.46,3770 v1@3511.46,3810 ; 3588.54,3840 3588.54,3868.54 3590,3870 ; 3646.81,4240 3646.81,4265.26 ; 3690,3880 3700,3880 ; 3700,4152.22 3726.85,4152.22 ; 3705.75,4300 3705.75,4309.15 ; 3720,4103.34 3730.35,4103.34 ; 3739.16,4490 3739.16,4504.25 ; 4040.01,3808.54 4058.54,3808.54 v1@4070,3820 ; 4135,4330 4135,4340 ; 4530,4330 v1(4598.55,4330) ; v1(4792.61,4038.16) 4828.16,4038.16 4830,4040 4830,4090 ; 5227.61,4860 5227.61,4887.01 ; 5330,4050 5350,4050 ; 5330,4070 5350,4070
  other v1: 4420,3160 4520,3160 5256,3187 3550,3210 3630,3210 4160,3280 4810,3320 5570,3345 3914.5,3359 5395,3500 3500,3550 4420,3580 3530,3590 5212.5,3617 4330,3620 5145.5,3629 4005.5,3686 5379.5,3694 5223,3696.5 4059.5,3701.5 4219.5,3702 4323,3705 3658,3722 4493,3756.5 4729,3780 4216.5,3787.5 4427,3788 3731.5,3795 3511.46,3802.08 4059,3820.5 5410,3830 5480,3830 5560,3830 4311,3841 5790,3890 4111.5,3894 3622.5,3895 3640.5,3938 5145.5,3953.5 5790,3970 5368.5,4030 5790,4050 3740.5,4065.5 5140,4110 5790,4130 3235.5,4133.5 5620,4160 5391,4182.5 3368.5,4205.5 5360,4220 5320,4260 5590,4280 4135,4284 4270,4300 3730,4306.5 3260,4330 3620,4330 5370,4350 5590,4350 5790,4350 4134.5,4379 3908.5,4424.5 5790,4450 4070,4470 3739,4475.5 3803,4476.5 4589.5,4498 3210,4530 4070,4540 5790,4550 4320,4560 4520,4560 3210,4630 4110,4640 5790,4650 3600,4660 4068,4676.5 3825,4712 3400,4730 3340,4790 4580,4820 4860,4820 5240,4820 3695,4874 3695,4961 4960,5020 5200,5020 5079.5,5021 4540,5030 4670,5030
L1_2: L1.2 USB1.1 | length 238.1
  Top Layer w6: USB1.1@3312.2,4631.17 3351.19,4631.18 3472.44,4752.43 L1.2@3472.44,4779.99
L3_1: L3.1 U16.3 | length 566.4
  Top Layer w6: L3.1@3395.97,3910 3465.5,3910 3565.5,3810 3654.5,3810 3671,3826.5 3753.5,3826.5 3781.19,3798.81 U16.3@3781.19,3677.4
LED8_1: R34.1 RX1.1 | length 198.5
  Top Layer w6: RX1.1@5110,3916.5 5266.5,3916.5 5287.05,3937.05 R34.1@5287.04,3950
LED10_2: R36.1 TX1.2 | length 212.1
  Top Layer w6: TX1.2@5104.17,4154.69 5104.17,4176.69 5114.47,4187.04 R36.1@5290,4187.04
PA02_AIN0: U1.3 U5.1 U5.3 | length 2044
  Top Layer w6: U5.1@4084.39,3733.59 4084.41,3754.41 4090,3760 4130,3760 4135.59,3754.41 U5.3@4135.57,3733.59 4135.59,3685.59 4135,3685 v1(4135,3677) ; v1(4771.88,4155.07) 4790,4173.2 4790,4220 4841.1,4271.1 U1.3@4841.1,4285.85
  Bottom Layer w6: v1(4135,3677) 3981,3523 3981,3459.5 4027.5,3413 4597,3413 4640,3456 4640,3529.47 4769.97,3659.47 4769.97,3740 v1(4771.88,4155.07)
PA03_VREFA: U1.4
PA04_AIN4: CN17.2 CN20.2 U1.9 | length 1578.3
  Top Layer w5.91: v1(4900,4130) 4900,4210 4959.17,4269.17 U1.9@4959.21,4285.85
  Top Layer w6: CN20.2@5059.19,3312.99 5059.2,3440.78 CN17.2@5108.42,3490
  Bottom Layer w6: v1(4900,4130) 4900,3760 4900,3590 4880,3570 4800,3570 4760,3530 4760,3420 4770,3410 5028.42,3410 CN17.2@5108.42,3490
PA05_AIN5: CN17.3 CN20.3 U1.10 | length 1239.4
  Top Layer w5.91: v1(4920,4100) 4920,4210.01 4978.87,4268.88 U1.10@4978.9,4285.85
  Top Layer w6: CN20.3@5009.99,3312.99 CN17.3@5010,3490
  Bottom Layer w6: 4919.97,3760 4919.97,3570 4859.97,3510 4859.97,3460 4889.97,3430 4949.97,3430 CN17.3@5010,3490 ; 4920,3760 v1(4920,4100)
PA06_DGI_GPIO2: CN15.4 CN18.5 U1.11 | length 1005.4
  Top Layer w5.91: U1.11@4998.58,4285.85 4998.57,4227.93 5021.47,4205 5145,4205 v1(5200,4260)
  Top Layer w6: CN18.5@5129.18,4887.01 5129.22,4759.2 CN15.4@5168.39,4720 ; CN15.4@5168.39,4720 5168.37,4578.08 5204.47,4542 v1(5242.5,4542)
  Bottom Layer w6: v1(5200,4260) 5242.5,4302.5 5242.5,4332.49 v1(5242.5,4542)
PA07_DGI_GPIO3: CN15.5 CN18.6 U1.12 | length 958.4
  Top Layer w5.91: U1.12@5018.27,4285.85 5018.27,4231.73 5029.97,4220 5120,4220 v1(5180,4280)
  Top Layer w6: CN18.6@5178.4,4887.01 5178.43,4808.41 CN15.5@5266.81,4720 5219.97,4673.13 v1(5219.97,4580)
  Bottom Layer w6: v1(5180,4280) 5219.97,4320 v1(5219.97,4580) ; CN15.5@5266.87,4686.83 CN15.5@5266.87,4720
PA08_TCC0-W4: CN5.1 CN6.3 R28.2 U1.13 U14.2 | length 1549.5
  Top Layer w6: v1(5030,4090) 5060.07,4059.97 5127.97,4060.01 5184.17,4003.76 5156.27,4003.76 5139.97,4020 5089.97,4020 5069.97,4000 5069.97,3900 5089.97,3880 5379.97,3880 5459.97,3960 5519.97,3960 5549.97,3990 5549.97,4080 5521.57,4108.42 CN5.1@5479.99,4108.42 ; v1(5040,4280) 5044.15,4284.15 U1.13@5044.15,4311.73 ; R28.2@5180,4003.76 5187.39,4011.15 U14.2@5242.85,4011.15 ; 5549.97,4008.75 5556.67,4014.71 ; 5549.97,4021.25 5556.67,4014.71 ; CN6.3@5652.98,4014.71 5556.67,4014.71
  Bottom Layer w6: v1(5030,4090) 5019.97,4100 5019.97,4150 5009.97,4160 5009.97,4220.02 5039.97,4249.99 v1(5040,4280)
PA09_TCC0-W1: CN6.2 R26.2 U1.14 U14.10 | length 850.7
  Top Layer w6: U1.14@5044.15,4331.42 5058.58,4331.42 5070,4320 5202.97,4320 5341.47,4181.53 U14.10@5341.47,4102.29 ; U14.10@5341.28,4102.26 5402.61,4102.29 R26.2@5410,4109.69 ; R26.2@5404.17,4105.87 5458.27,4160 5569.97,4160 5599.97,4130 5599.97,4080 5616.07,4063.91 CN6.2@5652.98,4063.91
PA10_TCC0-W2: CN17.4 CN20.4 U1.15 | length 1198
  Top Layer w6: CN17.4@4911.57,3490 4960.8,3440.77 CN20.4@4960.8,3312.99 ; U1.15@5044.15,4351.1 5088.9,4351.1 v1(5090,4350)
  Bottom Layer w6: CN17.4@4911.57,3490 5050,3628.43 5050,3763.88 ; 5050.03,3760 5050.03,4120 5030.03,4140 5030.03,4220 5090,4279.96 v1(5090,4350)
PA11_TCC0-W3: CN5.3 CN6.5 U1.16 | length 1271.5
  Top Layer w6: U1.16@5044.17,4370.79 5269.17,4370.79 5449.97,4190 5689.97,4190 5749.97,4130.03 5749.97,3949.96 5716.27,3916.31 CN6.5@5652.98,3916.31 ; CN5.3@5479.99,3911.57 5484.73,3916.31 CN6.5@5652.98,3916.31
PA12_S4_SPI_MISO: CN16.2 CN19.3 U1.21 | length 1165.1
  Top Layer w6: U1.21@5044.15,4469.21 5320.74,4469.21 CN16.2@5479.96,4628.42 5471.57,4628.42 5419.97,4680 5419.97,4729.96 5469.97,4780 5619.97,4780 5709.97,4690 5709.97,4570 5693.07,4553.11 CN19.3@5652.98,4553.11
PA13_GPIO: CN16.5 CN19.6 U1.22 | length 704.2
  Top Layer w6: U1.22@5044.15,4488.9 5045.25,4490 v1(5310,4490) ; CN16.5@5479.96,4333.15 5552.28,4405.47 CN19.6@5652.98,4405.47
  Bottom Layer w6: v1(5310,4490) 5323.11,4490 CN16.5@5479.96,4333.15
PA14_TCC0-W0: CN7.3 CN8.5 U1.23 | length 1673.2
  Top Layer w6: U1.23@5044.27,4508.69 5045.58,4510 v1(5140,4510) ; CN7.3@5479.99,3481.57 CN8.5@5652.98,3482.31
  Bottom Layer w6: v1(5140,4510) 5140,4290.03 5069.97,4220 5069.97,4150 5069.97,3590.03 5099.97,3560 5401.57,3560 CN7.3@5479.99,3481.57
PA15_TCC0-W5: R24.2 U1.24 U6.1 U7.1 U11.6 | length 1845.9
  Top Layer w6: U7.1@4464.41,3734.4 4464.41,3726.9 4447,3709.5 4402.5,3709.5 4355,3757 4294.5,3757 4281.91,3744.4 4281.91,3736.09 4281.91,3718.09 4314.5,3685.5 4736.97,3685.5 4769.97,3718.48 4769.97,3939.99 4785.57,3955.59 U11.6@4797.38,3955.58 4815.57,3955.58 4899.97,4039.99 4899.97,4050 4999.97,4150 5039.97,4150 v1(5050,4160) ; U11.6@4789.48,3954.86 4790.21,3955.58 U11.6@4797.38,3955.58 ; U1.24@5044.15,4528.27 5045.88,4530 v1(5120,4530)
  Bottom Layer w6: v1(5050,4160) 5050,4219.96 5120,4289.99 v1(5120,4530)
PA16_S1_MOSI: CN15.3 CN18.4 U1.25 | length 358.4
  Top Layer w6: U1.25@5018.27,4554.15 5018.27,4558.27 5040,4580 5039.97,4690.01 CN15.3@5069.96,4720 ; CN15.3@5069.96,4720 5080,4730.01 CN18.4@5079.97,4887.01
PA17_S1_SCK: CN15.1 CN18.2 U1.26 | length 469
  Top Layer w6: CN18.2@4981.57,4887.01 4981.57,4828.43 CN15.1@4873.11,4720 4909.97,4720 4998.57,4631.4 4999.97,4630 5019.97,4610 5019.97,4590 4998.57,4568.57 U1.26@4998.58,4554.15
PA18_S1_SS: CN16.4 CN19.5 U1.27 | length 814.9
  Top Layer w6: U1.27@4978.9,4554.15 4978.9,4588.91 v1(4990,4600) ; CN16.4@5479.96,4431.57 5503.08,4454.69 CN19.5@5652.98,4454.69
  Bottom Layer w6: v1(4990,4600) 5009.97,4620 5049.97,4620 ; 5050,4620 5291.53,4620 5415.47,4496.06 ; 5411.53,4500 CN16.4@5479.96,4431.57
PA19_S1_MISO: CN15.2 CN18.3 U1.28 | length 362.5
  Top Layer w6: U1.28@4959.21,4554.15 4959.21,4619.22 v1(4960,4620) ; CN15.2@4971.57,4720 5030.79,4779.22 CN18.3@5030.76,4887.01
  Bottom Layer w6: v1(4960,4620) 4960,4708.43 CN15.2@4971.57,4720
PA20_TCC0-W6: R22.2 U1.29 U11.4 | length 1278.5
  Top Layer w6: U11.4@4797.38,3904.4 4824.37,3904.41 4839.97,3920 4839.97,3939.98 4890.07,3990 R22.2@4902.96,3990 4902.97,4002.95 4919.97,4020 v1(4939.97,4020) ; v1(4899.97,4640) 4939.57,4600.47 U1.29@4939.57,4554.15
  Bottom Layer w6: v1(4899.97,4640) 4769.97,4640 4670.03,4540 4670.03,4294.99 4764.97,4200 4872.97,4200 4939.97,4133 v1(4939.97,4020)
PA21_DGI_GPIO1: R23.2 U1.30 U12.6 | length 1331.6
  Top Layer w6: U12.6@4797.38,3805.58 4797.41,3857.41 v1(4870,3930) R23.2@4902.96,3930 ; v1(4850,4660) 4919.84,4590.16 U1.30@4919.84,4554.15
  Bottom Layer w6: v1(4850,4660) 4769.97,4660 4650.02,4540 4650.02,4289.98 4759.97,4180 4859.97,4180 4869.97,4170 v1(4870,3930)
PA22_S5_SDA: CN1.4 CN3.4 R5.1 U1.31 | length 573
  Top Layer w6: CN3.4@4678.08,4889.21 4720,4847.29 R5.1@4720,4827.04 ; R5.1@4720,4827.04 4685.54,4827.03 4647.64,4789.13 CN1.4@4647.61,4719.95 4667.64,4700 4780,4700 4900.16,4579.84 U1.31@4900.16,4554.15
PA23_S5_SCL: CN1.3 CN3.3 R6.1 U1.32 | length 873.3
  Top Layer w6: CN3.3@4628.83,4889.22 4628.83,4908.84 4660.53,4940.5 4730.03,4940.5 4762.53,4908 4765.51,4905.02 R6.1@4765.5,4827.04 ; CN3.3@4628.88,4889.21 4628.88,4799.67 CN1.3@4549.18,4719.95 4599.21,4670 4779.97,4670 4880.47,4569.53 U1.32@4880.47,4554.15